# Altium PCB sami_updated_v2.PcbDoc
Units mm, origin at the board's own origin, x right, y up, seen from the top; angles counter-clockwise.
Board outline 29.4 x 15.49 mm, 2 copper layers (Top Layer, Bottom Layer); 20 components, 23 nets, 104 pads, 45 vias.
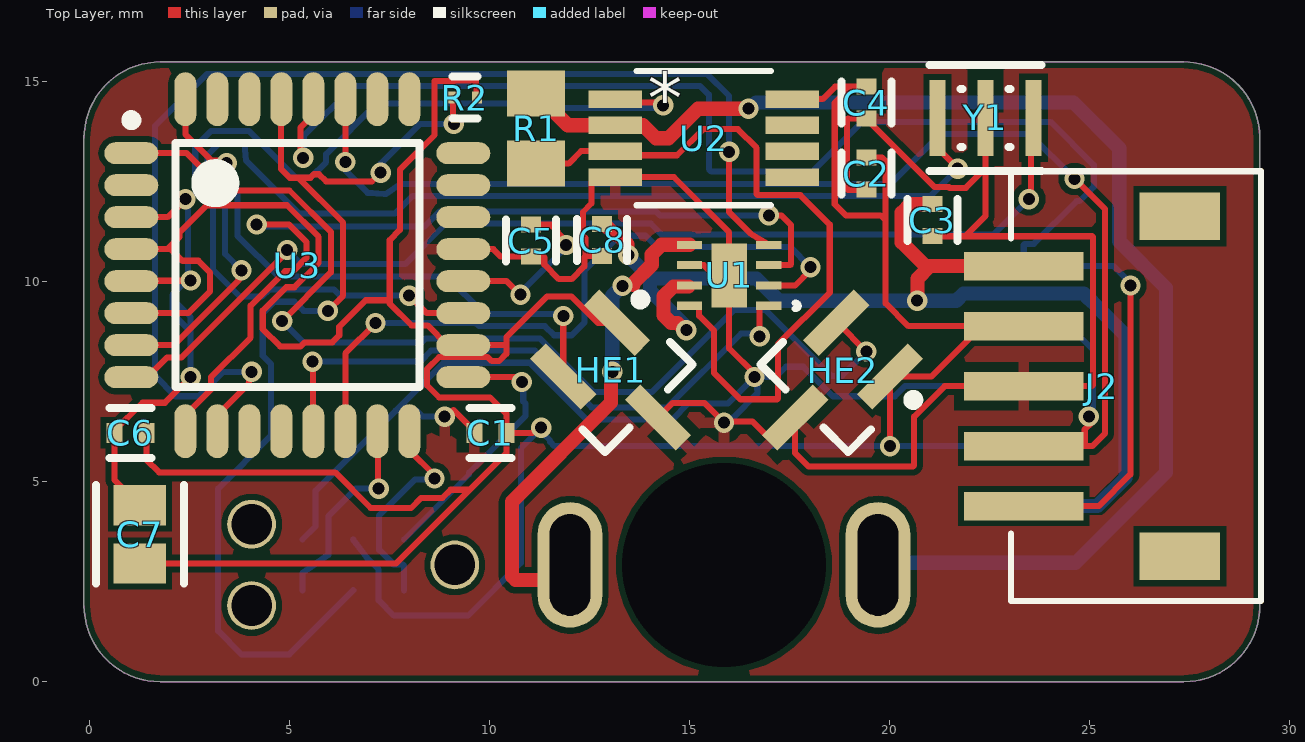
[diagram p0: Top Layer view]
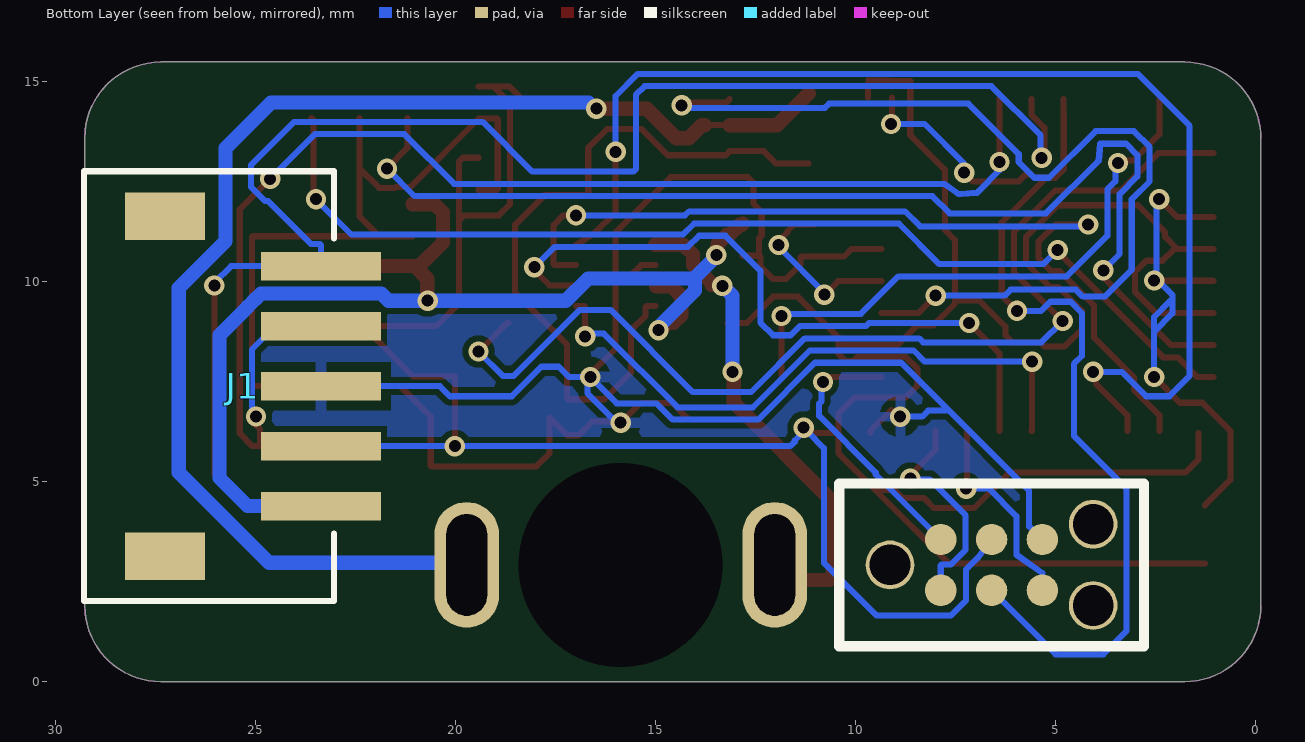
[diagram p1: Bottom Layer view, seen from below]
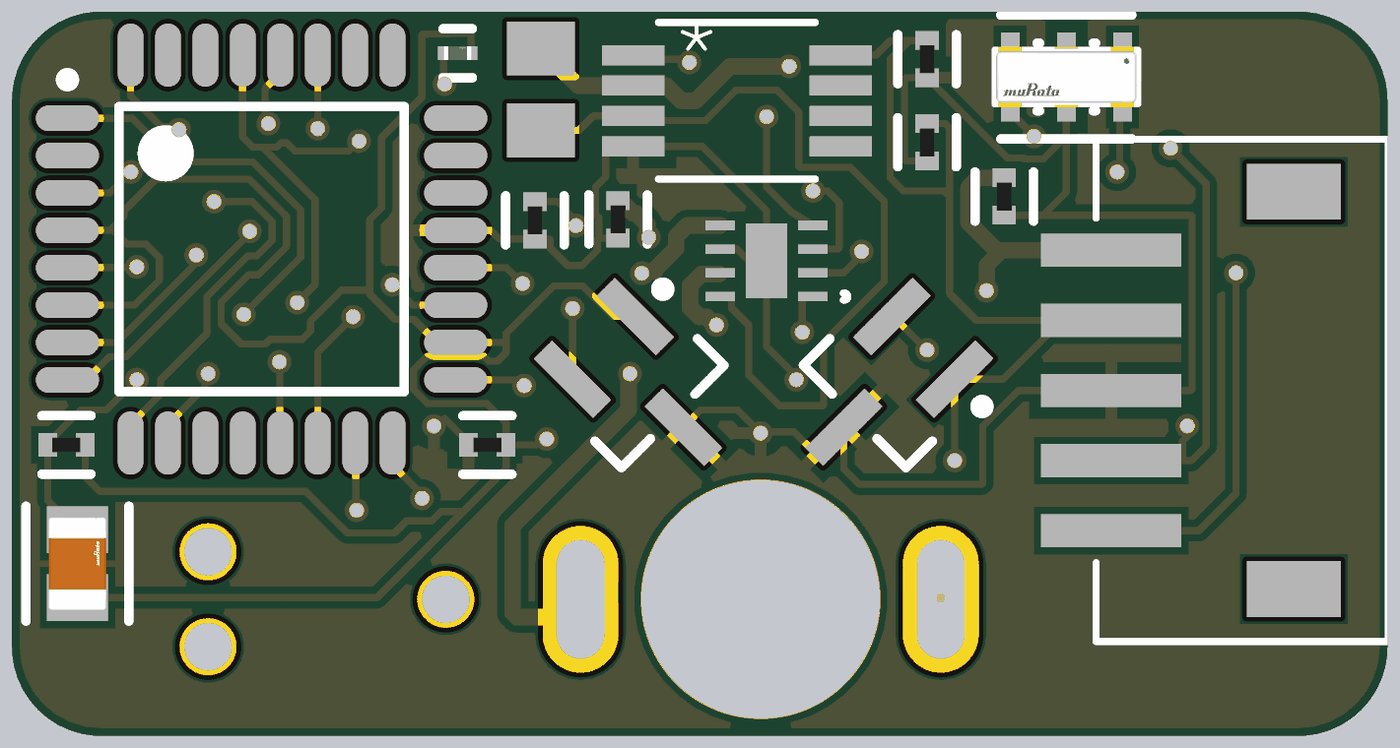
[diagram p2: 3D render of the assembled board from above, using the file's embedded part models]

## Layer stack, top to bottom
Top Solder: solder mask 0.0102, Solder Resist, Dk 3.5
Top Layer: signal copper 0.0356
Dielectric 1: dielectric 0.32, FR-4, Dk 4.8
Bottom Layer: signal copper 0.0356
Bottom Solder: solder mask 0.0102, Solder Resist, Dk 3.5

## Board outline
-0.127,1.905 ccw(c1.778,1.905) 1.778,0 27.368,0 ccw(c27.368,1.905) 29.273,1.905 29.273,13.589 ccw(c27.368,13.589) 27.368,15.494 1.778,15.494 ccw(c1.778,13.589) -0.127,13.589

## Design rules (kind name [scope] priority, off if disabled: settings)
Clearance Clearance_1 [All] p1: gap=0.152 ignorepadtopadclearanceinfootprint=FALSE except(0: Arc-Hole Track-Hole SMDPad-Hole THPad-Hole Via-Hole Fill-Hole Poly-Hole Region-Hole Text-Hole)
HoleSize [All] p1: absolutevalues=TRUE maxlimit=2.54 minlimit=0.3 maxpercent=80.000 minpercent=20.000
MinimumAnnularRing [All] p1: minimumring=0.2
PolygonConnect [All] p1: connectstyle=Relief reliefconductorwidth=0.254 reliefentries=4 polygonreliefangle="90 Angle" airgapwidth=0.254
RoutingVias [All] p1: holewidth=0.3 width=0.508 viastyle="Through Hole" minholewidth=0.3 minwidth=0.508 maxholewidth=0.3 maxwidth=0.508
SolderMaskExpansion [All] p1: expansion=0.102 istentingtop=FALSE
Width [All] p1: maxlimit=0.381 minlimit=0.152 preferedwidth=0.152 minimp=50.000000 maximp=50.000000 favimp=50.000000
29 further rules are at their usual default settings.

## Components (designator, comment, footprint, x,y, rotation, side; value= is the part's Value field where it differs from the comment)
* "Poluou motor" PCBComponent_1 12.025,2.921 r0 top
C1 "GRM155R71C104KA88D - 0.1 uF" FP-GRM15-MFG 10.033,6.223 r0 top value=0.10μF
C2 "GRM155R71C104KA88D - 0.1 uF" FP-GRM15-MFG 19.431,12.7 r90 top value=0.10μF
C3 "GRM155R71C104KA88D - 0.1 uF" FP-GRM15-MFG 21.082,11.538 r90 top value=0.10μF
C4 "GRM155R71C104KA88D - 0.1 uF" FP-GRM15-MFG 19.431,14.478 r90 top value=0.10μF
C5 "GRM155R71C104KA88D - 0.1 uF" FP-GRM15-MFG 11.049,11.03 r90 top value=0.10μF
C6 "GRM155R71C104KA88D - 0.1 uF" FP-GRM15-MFG 1.035,6.223 r0 top value=0.10μF
C7 "GRM21BR61E106KA73L - 10 uF" FP-GRM21B-0_15-IPC_C 1.27,3.683 r90 top
C8 "GRM155R71C104KA88D - 0.1 uF" FP-GRM15-MFG 12.827,11.049 r90 top value=0.10μF
ContactPad "6 Pin Contact Pad" 6PinContactPad 1.27,2.413 r90 bottom
HE1 "TLE4946-2K" INF-PG-SC59_M 13.375,7.453 r315 top
HE2 "TLE4946-2K" INF-PG-SC59_M 18.502,7.453 r225 top
J1 "S5B-ZR-SM4A-TF (LF) (SN)" CONN_S5B-ZR-SM4A-TF_JST 23.368,4.39 r90 bottom
J2 "S5B-ZR-SM4A-TF (LF) (SN)" CONN_S5B-ZR-SM4A-TF_JST 23.368,10.39 r270 top
R1 "RL1220S-R27-F - 0.27 Ohm - 1/3W" RESC2013X50X40NL20T20 11.176,13.829 r90 top
R2 "ERJ-1GNF1002C - 10kOhm" FP-ERJ1G-MFG 9.398,14.605 r0 top value=10kΩ
U1 "A3910EEETR-T" DFN-8_ALM 16.002,10.16 r180 top
U2 "INA2180A1IDGKR" DGK8_TEX 15.367,13.589 r0 top
U3 "ATmega328-AU" 32A_L 5.207,10.414 r0 top
Y1 "CSTNE16M0V53C000R0 - 16 MHz Crystal" FP-CSTNE16M0V53C000R0-MFG 22.409,14.097 r0 top

## Footprints (in the part's own frame and the unit in brackets; to place one, negate y for a bottom-side part, rotate by r counter-clockwise, add the part's x,y. Pads: shape width x height; smd on the part's side, far side on the other; paste and mask are expansions set on the pad)
6PinContactPad [mil]
  round 30.98 smd: 1(-5,260) 2(45,260) 3(-5,210) 4(45,210) 5(-5,160) 6(45,160)
  round 48 hole 40 unplated: 25(20,310) 26(-20,110) 27(60,110)
  silkscreen extent -60,60 100,360
32A_L [mm] "Thin QFP, 32-Leads, Body 7x7mm, Pitch 0.8mm, IPC High Density"
  oval 1.35x0.55 smd: 1(-4.15,2.8) 2(-4.15,2) 3(-4.15,1.2) 4(-4.15,0.4) 5(-4.15,-0.4) 6(-4.15,-1.2) 7(-4.15,-2) 8(-4.15,-2.8) 17(4.15,-2.8) 18(4.15,-2) 19(4.15,-1.2) 20(4.15,-0.4) 21(4.15,0.4) 22(4.15,1.2) 23(4.15,2) 24(4.15,2.8)
  oval 0.55x1.35 smd: 9(-2.8,-4.15) 10(-2,-4.15) 11(-1.2,-4.15) 12(-0.4,-4.15) 13(0.4,-4.15) 14(1.2,-4.15) 15(2,-4.15) 16(2.8,-4.15) 25(2.8,4.15) 26(2,4.15) 27(1.2,4.15) 28(0.4,4.15) 29(-0.4,4.15) 30(-1.2,4.15) 31(-2,4.15) 32(-2.8,4.15)
  silkscreen extent -4.27,-3.05 3.05,3.75, body extent -3.5,-3.5 3.5,3.5, height 1.2
CONN_S5B-ZR-SM4A-TF_JST [mil]
  rect 28x118 smd paste+0 mask+0: 1(0,0) 2(59.06,0) 3(118.11,0) 4(177.17,0) 5(236.22,0)
  rect 47x79 smd: 6(-49.21,153.62) 7(285.43,153.62)
  silkscreen extent -93,-13 330,233, body extent 0,0 10,10, height 10
DFN-8_ALM [mil]
  rect 25x8 smd paste+0 mask+0: 1(-39,30) 2(-39,10) 3(-39,-10) 4(-39,-30) 5(39,-30) 6(39,-10) 7(39,10) 8(39,30)
  rect 35x63 smd paste+0 mask+0: 9(0,0)
  silkscreen extent -68,27 -65,33, body extent 0,0 10,10, height 10
DGK8_TEX [mil]
  rect 52.5x17 smd paste+0 mask+0: 1(-87.25,38.39) 2(-87.25,12.8) 3(-87.25,-12.8) 4(-87.25,-38.39) 5(87.25,-38.39) 6(87.25,-12.8) 7(87.25,12.8) 8(87.25,38.39)
  silkscreen extent -66,-66 66,66, body extent 0,0 10,10, height 10
FP-CSTNE16M0V53C000R0-MFG [mm]
  rect 0.4x1.9 smd paste+0 mask+0: 1(-1.2,0) 2(0,0) 3(1.2,0)
  silkscreen extent -1.4,-1.33 1.4,1.33, body extent -1.6,-0.65 1.6,0.65, height 1
FP-ERJ1G-MFG [mm]
  rect 0.25x0.3 smd paste+0 mask+0: 1(-0.3,0) 2(0.3,0)
  silkscreen extent -0.32,-0.53 0.32,0.53, body extent -0.53,-0.27 0.53,0.27, height 0.25
FP-GRM15-MFG [mm]
  rect 0.4x0.5 smd paste+0 mask+0: 1(-0.4,0) 2(0.4,0)
  silkscreen extent -0.53,-0.62 0.53,0.62, body extent -0.7,-0.38 0.7,0.38, height 0.25
FP-GRM21B-0_15-IPC_C [mm]
  rect 1.006x1.308 smd paste+0 mask+0: 1(-0.726,0) 2(0.726,0)
  silkscreen extent -1.23,-1.1 1.23,1.1, body extent -1,-0.63 1,0.63, height 1.4
INF-PG-SC59_M [mm] "SOT23, 3-Leads, Body 3x1.53mm, Pitch 0.95mm, IPC Low Density"
  rect 1.8x0.55 smd: 1(-1.2,0.95) 2(-1.2,-0.95) 3(1.2,0)
  silkscreen extent -1.32,-1.55 0.88,1.9, body extent -0.88,-1.55 0.88,1.55, height 1.35
PCBComponent_1 [mm]
  round 0 hole 5.1: 28(3.85,0)
  rrect100% 1.62x3.14 hole 1.02 slot 2.54 at 90 deg: m+(7.7,0) m-(0,0)
RESC2013X50X40NL20T20 [mm] "Chip Resistor, 2-Leads, Body 2.00x1.25mm, IPC Medium Density"
  rect 1.15x1.45 smd: 1(-0.875,0) 2(0.875,0)
  body extent -1.1,-0.72 1.1,0.72, height 0.5

## Part data
C1 C2 C3 C4 C5 C6 C8: library part CMP-2100-03641-2, "CAP CER 0.1UF 16V X7R 0402", Capacitance=0.10μF, Manufacturer=Murata, Manufacturer Part Number=GRM155R71C104KA88D, Package=GRM15, Temperature="-55°C to +125°C", Temperature Characteristic=X7R, Temperature Range High=+125°C, Temperature Range Low=-55°C, Tolerance=10%, Voltage Rating=16Vdc, Category=Cap, ComponentLink2Description=Datasheet, ComponentLink2URL=https://search.murata.co.jp/Ceramy/image/img/A01X/G101/ENG/GRM155R71H471KA01-01A.pdf, Device Class L1="Passive Components", Device Class L2=Capacitors, Device Class L3="Ceramic Capacitors", Digikey Description="CAP CER 0.1UF 16V X7R 0402", Height=0.55mm, Ipc Land Pattern Name=CAPC10050X219, Lead Free=yes, Material=Ceramic, Mouser Description="0402 0.1 uF 16V ±10 % Tolerance X7R SMT Multilayer Ceramic Capacitor", Octopart=https://octopart.com/grm155r71c104ka88d-murata-196880, RoHS=TRUE, Standoff Height=0mm
C7: library part CMP-2007-03541-2, "Chip Multilayer Ceramic Capacitors for General Purpose, 0805, 10uF, X5R, 15%, 10%, 25V", Capacitance=10uF, Case Code (Imperial)=0805, Case Code (Metric)=2012, Dielectric=X5R, Max Operating Temperature=85°C, Min Operating Temperature=-55°C, Package Quantity=1, Tolerance=10%, Voltage=25V, Case/Package=0805, Depth=1.25mm, Height=1.25mm, Lead Free="Lead Free", Length=2mm, Material=Ceramic, Mount="Surface Mount", Packaging="Tape and Reel", Radiation Hardening=No, Termination=SMD/SMT, Thickness=0.053inch, Voltage Rating=25V, Voltage Rating (DC)=25V, Width=0.049inch
HE1 HE2: library part CMP-1148-00006-1, "High Precision Hall Effect Latch, PG-SC59, Reel, Green", Manufacturer=Infineon, Bhyst (25degreesC) max="4Â mT", Bop (25degreesC) min="2Â mT", Brp (25degreesC) typ="-2Â mT", Chopped Hall Technology=TRUE, ComponentLink1Description="Manufacturer URL", ComponentLink1URL=http://www.infineon.com/, ComponentLink2Description=Datasheet, ComponentLink2URL=http://www.infineon.com/dgdl/TLE4946-2K_DS_Rev1.pdf?folderId=db3a30431f848401011facc1c83b4674&fileId=db3a30431f848401011fbc925c48637f, ComponentLink3Description="Package Specification", ComponentLink3URL=http://www.infineon.com/dgdl/SC59-Package_Overview.pdf?folderId=db3a30431936bc4b01194dc0d34440b0&fileId=db3a30431936bc4b01194dd1aa1d40cf, DatasheetVersion="Rev. 1.0", Direction Detection=FALSE, Green=TRUE, Interface="open collector", Mounting Technology="Surface Mount", PackageDescription="3-Pin Semiconductor Package, 3 x 1.53 mm Body, 0.95 mm Pitch", PackageReference=PG-SC59, PackageVersion=Mar-08, Packing=Reel, PartNumber=TLE4946-2K, Target Application=Automotive, Type=Latch
J1 J2: "No Description Available", Mfr_Name=JST, Copyright="Copyright (C) 2021 Ultra Librarian. All rights reserved.", Manufacturer_Part_Number="S5B-ZR-SM4A-TF (LF) (SN)", RefDes=RefDes, Type=DEV
R1: library part CMP-2001-03162-1, Manufacturer=Susumu, Part Number=RL1220S-R27-F
R2: library part CMP-2004-03445-2, "RES SMD 10K OHM 1% 1/20W 0201", Manufacturer="Panasonic Electronic Components", Manufacturer Part Number=ERJ-1GNF1002C, Package=ERJ1G, Power Rating=0.05W, Resistance=10kΩ, Temperature="-55°C to +125°C", Temperature Coefficient=200ppm/°C, Temperature Range High=+125°C, Temperature Range Low=-55°C, Tolerance=1%, Voltage Rating=25V, Automotive=Yes, Automotive Grade="Grade 1", Category=Res, ComponentLink2Description=Datasheet, ComponentLink2URL=https://industrial.panasonic.com/cdbs/www-data/pdf/RDA0000/AOA0000C304.pdf, Composition="Thick Film", Device Class L1="Passive Components", Device Class L2=Resistors, Device Class L3="Chip SMD Resistors", Digikey Description="RES SMD 10K OHM 1% 1/20W 0201", Footprint Url=https://industrial.panasonic.com/cdbs/www-data/pdf/RDA0000/DMA0000COL17.pdf, Height=0.26mm, Lead Free=Yes, Mouser Description="Thick Film Resistors - SMD 0201 10Kohm 1% HalogenFree AEC-Q200", Octopart=https://octopart.com/erj-1gnf1002c-panasonic-55419697, RoHS=TRUE, Series=ERJ
U1: "No Description Available", Mfr_Name="Allegro Microsystems Inc.", Copyright="Copyright (C) 2021 Ultra Librarian. All rights reserved.", Manufacturer_Part_Number=A3910EEETR-T, RefDes=RefDes, Type=DEV
U2: "No Description Available", Mfr_Name="Texas Instruments", Copyright="Copyright (C) 2021 Ultra Librarian. All rights reserved.", Manufacturer_Part_Number=INA2180A1IDGKR, RefDes=RefDes, Type=DEV
U3: library part CMP-0095-00261-2, "8-bit AVR Microcontroller, 32KB Flash, 1KB EEPROM, 2KB SRAM, 32-pin TQFP, Industrial Grade (-40°C to 85°C)", Code_JEDEC=MS-026-ABA, ComponentLink1Description="Manufacturer URL", ComponentLink1URL=http://www.atmel.com/, ComponentLink2Description="ATmega48A/48PA/88A/88PA/168A/168PA/328/328P Datasheet", ComponentLink2URL=http://www.atmel.com/dyn/resources/prod_documents/doc8271.pdf, ComponentLink3Description="ATmega48A/48PA/88A/88PA/168A/168PA/328/328P Summary", ComponentLink3URL=http://www.atmel.com/dyn/resources/prod_documents/8271S.pdf, DatasheetVersion="revD, May-2011", PackageDescription="32-Lead, 7x7x1.0 mm Body, 0.8mm Lead Pitch, Thin Profile Plastic Quad Flat Package (TQFP)", PackageReference=32A, PackageVersion="revC, Oct-2010", RevisionNote="DatasheetVersion & PackageVersion updated. URLs added."
Y1: library part CMP-06057-000009-1, "CERAMIC RES 16.0000MHZ 15PF SMD", Capacitance=15pF, Case/Package=SMD/SMT, Frequency=16MHz, Frequency Stability=0.15%, Frequency Tolerance=0.5%, Max Operating Temperature=125°C, Min Operating Temperature=-40°C, Resistor Type=Ceramic, Impedance=40R, Mount="Surface Mount", Packaging="Tape and Reel"

## Via types
v1: diameter 0.508, hole 0.3, Top Layer to Bottom Layer, tented both sides, 45 vias

## Nets (pads, with @x,y where several pads share a name; then routed paths per layer and width w, separated by ;. In a path a pad name is that pad's centre, name@x,y a point inside that pad or via, vN(x,y) a via of type N, cw(c..) or ccw(c..) an arc to the next point about the centre after c; other vN are vias at no path point)
CUR1_TO_OPAMP_IN+: R1.1 U1.8 U2.3 | length 18.3
  Top Layer w0.152: R1.1 11.989,12.954 12.299,13.264 U2.3 13.252,13.162 14.699,13.162 15.354,13.818 16.218,13.818 16.688,13.348 16.688,12.192 16.713,12.167 17.78,12.167 18.517,11.43 18.517,9.728 17.221,8.433 17.221,7.087 17.196,7.061 16.281,7.061 15.621,7.722 15.621,8.782 15.253,9.15 15.253,9.373 15.227,9.398 U1.8
CURRENT_IN: U2.1 U3.19 | length 24.7
  Top Layer w0.152: v1(8.001,9.652) 8.439,9.214 U3.19 ; U2.1 13.237,14.478 14.283,14.478 v1(14.351,14.41)
  Bottom Layer w0.152: v1(8.001,9.652) 6.279,9.652 6.126,9.804 4.5,9.804 4.322,9.627 3.774,9.627 3.099,10.302 3.099,12.062 2.654,12.506 2.654,13.373 3.048,13.767 4,13.767 5.168,12.598 5.534,12.598 5.924,12.989 5.924,13.192 7.185,14.453 10.667,14.453 10.773,14.346 14.288,14.346 v1(14.351,14.41)
GND: C1.1 C2.1 C3.1 C4.1 C5.1 C8.1 ContactPad.6 HE1.3 HE2.3 J1.3 J2.3 U1.6 U1.9 U2.4 U3.21 Y1.2 | length 72.9
  Top Layer w0.152: v1(8.89,6.628) 8.954,6.628 9.116,6.79 9.633,6.273 C1.1 ; U3.21 10.109,10.814 10.293,10.63 C5.1 11.354,10.63 11.379,10.605 11.379,10.433 11.747,10.065 12.065,10.065 12.383,10.383 12.383,10.617 12.415,10.649 ; C8.1 12.415,10.649 ; HE1.3 14.592,6.972 15.38,6.972 v1(15.875,6.477) 15.902,6.504 16.588,6.504 16.93,6.162 17.211,6.162 HE2.3 17.653,5.715 17.983,5.385 20.599,5.385 20.625,5.41 20.625,6.628 21.387,7.39 J2.3 25.07,7.39 25.095,7.415 25.095,11.113 25.07,11.138 21.907,11.138 ; U1.6 15.367,10.414 15.621,10.16 U1.9 ; v1(16.637,7.62) 16.637,7.696 16.002,8.331 U1.9 ; C2.1 18.974,12.3 18.948,12.325 18.948,14.053 18.974,14.078 C4.1 21.142,12.367 21.495,12.367 21.517,12.344 21.917,12.344 22.409,12.836 22.409,12.929 ; C3.1 21.907,11.138 ; Y1.2 22.409,12.929 ; 12.415,10.649 12.415,11.088 12.348,11.154 12.348,11.744 12.56,11.956 12.56,12.474 12.7,12.614 14.624,12.614 16.002,11.236 U1.9 ; 21.907,11.138 22.409,11.639 22.409,12.929
  Bottom Layer w0.152: ContactPad.6 5.665,3.887 5.665,4.776 7.668,6.779 ; v1(8.89,6.628) 8.342,6.628 8.191,6.779 7.668,6.779 ; v1(15.875,6.477) 15.971,6.477 16.108,6.614 16.115,6.614 16.708,7.207 16.708,7.3 16.705,7.303 16.705,7.552 v1(16.637,7.62) ; J1.3 20.397,7.39 20.145,7.137 18.596,7.137 17.86,7.874 17.423,7.874 17.169,7.62 v1(16.637,7.62) ; 7.668,6.779 8.865,7.976 11.019,7.976 12.442,6.553 14.579,6.553 14.985,6.96 15.977,6.96 v1(16.637,7.62)
INPUT1: U1.1 U3.13 | length 15.4
  Top Layer w0.152: v1(5.588,8.001) 5.597,7.992 5.597,6.273 U3.13 ; v1(16.764,8.636) 16.764,9.373 16.789,9.398 U1.1
  Bottom Layer w0.152: v1(5.588,8.001) 8.275,8.001 8.555,8.28 11.146,8.28 12.568,6.858 14.453,6.858 16.299,8.704 16.696,8.704 v1(16.764,8.636)
INPUT2: U1.2 U3.14 | length 17.4
  Top Layer w0.152: U3.14 6.407,8.21 v1(7.163,8.966) ; U1.2 17.653,9.906 18.034,10.287 v1(18.034,10.363)
  Bottom Layer w0.152: v1(7.163,8.966) 9.672,8.966 9.749,8.89 11.398,8.89 11.627,8.661 12.065,8.661 12.383,8.979 12.383,10.274 13.259,11.151 13.916,11.151 14.195,10.871 17.526,10.871 v1(18.034,10.363)
INPUT3: U1.3 U3.9 | length 22.8
  Top Layer w0.152: U3.9 2.407,6.664 3.046,7.303 3.046,7.612 4.039,8.605 4.039,9.402 4.903,10.267 5.107,10.267 5.436,10.595 5.436,10.995 5,11.43 v1(4.191,11.43) ; U1.3 17.526,10.414 17.551,10.439 17.551,11.417 17.31,11.659 v1(16.993,11.659)
  Bottom Layer w0.152: v1(4.191,11.43) 4.239,11.382 8.39,11.382 8.768,11.76 14.168,11.76 14.27,11.659 v1(16.993,11.659)
INPUT4: U1.4 U3.10 | length 30.3
  Top Layer w0.152: U3.10 3.207,6.664 3.996,7.453 3.996,7.679 v1(4.064,7.747) ; v1(16.002,13.249) 16.002,11.74 16.535,11.207 U1.4
  Bottom Layer w0.152: v1(4.064,7.747) 3.349,7.747 2.74,7.137 2.159,7.137 1.651,7.645 1.651,13.898 2.95,15.197 15.448,15.197 16.002,14.643 v1(16.002,13.249)
M+: *.m+ R1.2 U2.2 | length 32.7
  Top Layer w0.152: U2.2 U2.2@13.772,13.914 ; 14.351,13.589 14.356,13.594
  Top Layer w0.356: R1.2 11.966,13.914 U2.2 ; U2.2@13.772,13.914 13.85,13.914 14.175,13.589 14.351,13.589 14.487,13.589 15.224,14.326 v1(16.485,14.326)
  Bottom Layer w0.152: *.m+ *.m+@19.725,2.972
  Bottom Layer w0.356: v1(16.485,14.326) 16.526,14.326 16.678,14.478 24.613,14.478 25.756,13.335 25.756,11.012 26.924,9.843 26.924,5.232 24.663,2.972 *.m+@19.725,2.972
M-: *.m- U1.5 | length 13.3
  Top Layer w0.152: 10.572,2.629 10.662,2.54 ; *.m-@11.347,3.87 12.025,3.192 *.m- *.m-@11.644,2.54
  Top Layer w0.356: 10.572,2.629 10.572,4.5 13.052,6.979 13.052,7.718 v1(13.081,7.747) v1@13.099,7.765 ; 10.662,2.54 *.m-@11.644,2.54 ; 13.609,9.926 13.609,9.968 14.068,10.426 14.068,10.678 14.312,10.922 U1.5
  Bottom Layer w0.356: v1(13.081,7.747) 13.081,9.652 v1@13.335,9.906
  other v1: 13.335,9.897
MISO: ContactPad.1 U3.16 | length 5.5
  Top Layer w0.152: U3.16 8.007,5.787 8.636,5.157 v1(8.636,5.08)
  Bottom Layer w0.152: ContactPad.1 7.874,2.908 7.849,2.934 7.616,2.934 7.252,3.298 7.252,4.156 8.153,5.058 8.614,5.058 v1(8.636,5.08)
MOSI: ContactPad.5 U3.15 | length 5.2
  Top Layer w0.152: U3.15 7.223,6.248 7.223,4.842 v1(7.239,4.826)
  Bottom Layer w0.152: ContactPad.5 5.334,2.718 5.982,3.175 5.982,4.14 6.668,4.826 v1(7.239,4.826)
NetC5_2: C5.2 U3.20 | length 4.4
  Top Layer w0.152: U3.20 10.44,10.014 10.776,9.677 v1(10.786,9.677) ; C5.2 11.544,11.43 11.706,11.269 11.706,11.236 11.928,11.013 v1(11.928,10.917)
  Bottom Layer w0.152: v1(10.786,9.677) 10.786,9.726 11.928,10.868 v1(11.928,10.917)
NetC6_1: C6.1 C7.2 U3.3 U3.5 | length 13.5
  Top Layer w0.152: U3.5 1.066,10.024 2.531,10.024 v1(2.54,10.033) ; U3.3 1.962,11.614 v1(2.413,12.065) ; C7.2 0.635,5.044 0.635,6.273 1.336,6.974 1.894,6.974 v1(2.54,7.62)
  Bottom Layer w0.152: 2.134,9.525 2.54,9.119 2.54,8.75 ; v1(2.413,12.065) 2.476,12.002 2.476,10.096 v1(2.54,10.033) 2.445,10.033 2.083,9.671 2.083,9.525 2.083,9.207 2.54,8.75 ; v1(2.54,7.62) 2.54,8.75
NetU3_7: U3.7 Y1.1 | length 28.6
  Top Layer w0.152: U3.7 2.114,8.414 3.742,10.042 3.742,10.219 v1(3.81,10.287) ; Y1.1 21.209,13.347 21.717,12.839 v1(21.717,12.827)
  Bottom Layer w0.152: v1(3.81,10.287) 3.404,10.693 3.404,12.188 2.959,12.632 2.959,13.167 3.242,13.449 3.886,13.449 3.924,13.03 5.245,11.709 7.654,11.709 8.085,12.141 21.031,12.141 v1(21.717,12.827)
NetU3_8: U3.8 Y1.3 | length 26.9
  Top Layer w0.152: U3.8 1.457,7.614 1.952,8.109 2.315,8.109 4.953,10.748 v1(4.953,10.795) ; v1(23.495,12.065) 23.552,12.122 23.552,14.04 Y1.3
  Bottom Layer w0.152: v1(4.953,10.795) 5.309,10.439 7.908,10.439 8.924,11.455 14.042,11.455 14.322,11.176 22.606,11.176 v1(23.495,12.065)
Q1: HE1.2 U3.32 | length 14.6
  Top Layer w0.152: U3.32 2.407,13.684 3.056,13.035 3.374,13.035 v1(3.442,12.967) ; HE1.2 v1(11.855,9.144)
  Bottom Layer w0.152: v1(3.442,12.967) 3.51,12.899 3.51,12.513 3.708,12.314 3.708,11.151 4.724,10.135 8.935,10.135 9.875,9.195 11.804,9.195 v1(11.855,9.144)
Q2: HE2.2 U3.1 | length 26.8
  Top Layer w0.152: U3.1 2.438,13.214 3.371,12.281 5.012,12.281 6.045,11.247 6.045,10.236 v1(4.826,9.017) ; HE2.2 18.713,8.973 v1(19.431,8.255)
  Bottom Layer w0.152: v1(4.826,9.017) 5.359,8.484 8.313,8.484 8.415,8.585 11.272,8.585 12.618,7.239 14.072,7.239 16.129,9.296 16.901,9.296 18.552,7.646 18.822,7.646 v1(19.431,8.255)
RESET: ContactPad.3 R2.1 U3.29 | length 26.3
  Top Layer w0.152: U3.29 4.807,14.376 4.807,14.173 4.801,14.173 4.801,13.03 4.801,12.815 5.017,12.598 5.232,12.598 ; v1(5.969,9.271) 6.35,9.652 6.35,11.481 5.232,12.598 ; v1(7.29,12.725) 7.074,12.509 5.924,12.509 5.748,12.686 5.622,12.686 5.534,12.598 5.232,12.598 ; R2.1 9.098,13.97 9.119,13.949 v1(9.119,13.945)
  Bottom Layer w0.152: v1(5.969,9.271) 5.364,9.271 5.135,9.5 4.626,9.5 4.343,9.217 4.343,8.15 4.547,7.947 4.547,6.147 3.226,4.826 3.226,1.27 3.81,0.686 5.004,0.686 ContactPad.3 ; v1(7.29,12.725) 7.29,12.954 8.28,13.945 v1(9.119,13.945)
SCK: ContactPad.2 U3.17 | length 6.7
  Top Layer w0.152: U3.17 10.698,7.614 v1(10.819,7.493)
  Bottom Layer w0.152: ContactPad.2 9.498,5.18 9.498,5.228 10.916,6.645 10.916,6.949 10.854,7.01 10.854,7.458 v1(10.819,7.493)
SCL: J1.5 J2.5 U3.28 | length 39.4
  Top Layer w0.152: v1(5.351,13.098) 5.283,13.166 5.283,13.849 5.607,14.173 U3.28 ; J2.5 25.243,4.39 26.035,5.182 v1(26.035,9.906)
  Bottom Layer w0.152: v1(5.351,13.098) 5.376,13.123 5.376,13.657 6.612,14.892 15.278,14.892 15.494,14.677 15.494,12.814 15.557,12.751 18.085,12.751 19.329,13.995 24.037,13.995 25.121,12.912 25.121,12.373 24.762,12.014 24.689,12.014 23.622,10.947 23.393,10.947 23.368,10.922 J1.5 25.615,10.39 26.035,9.97 v1(26.035,9.906)
SDA: J1.4 J2.4 U3.27 | length 34.7
  Top Layer w0.152: v1(6.407,12.992) U3.27 ; J2.4 24.892,5.89 ; v1(24.638,12.573) 25.4,11.811 25.4,6.208 25.082,5.89 24.892,5.89 ; v1(24.994,6.632) 25.052,6.573 25.052,6.467 24.892,6.307 24.892,5.89
  Bottom Layer w0.152: v1(6.407,12.992) 6.407,12.783 6.925,12.265 6.964,12.225 7.369,12.192 7.424,12.192 7.464,12.22 7.781,12.446 20.041,12.446 21.285,13.691 23.52,13.691 v1(24.638,12.573) ; J1.4 24.511,8.89 25.095,8.306 25.095,6.829 24.994,6.728 v1(24.994,6.632)
VCC: C1.2 C2.2 C4.2 C6.2 C7.1 ContactPad.4 HE1.1 HE2.1 J1.2 J2.2 R2.2 U2.8 U3.4 U3.6 U3.18 | length 98.5
  Top Layer w0.152: U3.6 2.483,9.214 3.023,9.754 3.023,10.233 2.732,10.523 2.332,10.523 2.042,10.814 1.956,10.814 ; U3.4 1.956,10.814 ; C7.1 7.675,2.957 9.519,4.801 ; C6.2 1.435,5.55 1.753,5.232 6.15,5.232 7.039,4.343 8.05,4.343 8.304,4.597 8.836,4.597 9.039,4.801 9.519,4.801 ; R2.2 9.677,15.037 8.636,15.011 8.636,13.665 7.772,12.802 7.772,11.297 7.518,11.043 7.518,9.538 ; v1(11.303,6.35) 11.207,6.35 11.08,6.223 C1.2 ; HE1.1 12.719,8.973 12.065,9.627 11.447,9.627 11.373,9.552 10.433,8.613 10.433,8.414 ; U2.8 18.339,14.564 18.653,14.878 19.05,14.878 ; C2.2 19.824,13.1 19.914,13.011 19.914,11.532 ; C4.2 19.05,14.878 ; v1(20.022,5.89) HE2.1 21.057,7.629 J2.2@22.317,8.89 ; J2.2 J2.2@22.317,8.89 ; 1.956,10.814 2.265,11.124 2.265,11.235 2.943,11.913 4.949,11.913 5.74,11.121 5.74,10.469 5.135,9.863 4.931,9.863 4.343,9.276 4.343,8.817 4.778,8.383 5.287,8.383 5.388,8.484 6.082,8.484 6.255,8.657 6.255,8.875 6.918,9.538 7.518,9.538 ; 7.518,9.538 7.518,9.452 8.061,8.909 8.462,8.909 8.957,8.414 10.433,8.414 ; 9.519,4.801 10.433,5.715 C1.2 ; C1.2 10.433,6.702 10.024,7.11 8.748,7.11 8.453,7.405 8.453,7.823 8.748,8.118 9.966,8.118 10.069,8.014 10.249,8.014 10.433,8.198 10.433,8.414 ; 19.05,14.878 18.644,14.472 18.644,11.938 18.923,11.659 19.787,11.659 19.914,11.532 ; 19.914,11.532 19.914,9.461 20.485,8.89 J2.2@22.317,8.89
  Bottom Layer w0.152: ContactPad.4 6.947,3.099 7.239,2.807 7.239,2.032 7.62,1.651 9.474,1.651 10.795,2.972 10.795,5.842 11.187,6.234 11.267,6.234 v1@11.303,6.198 ; v1(11.303,6.35) v1@11.303,6.198 ; J1.2 v1(20.022,5.89) 11.633,5.89 11.526,5.998 11.526,6.031 11.359,6.198 v1@11.303,6.198
VM: C3.2 C8.2 J1.1 J2.1 U1.7 | length 30.5
  Top Layer w0.152: U1.7@14.986,9.881 U1.7
  Top Layer w0.356: C8.2 12.849,11.427 12.899,11.427 13.147,11.179 13.214,11.179 13.454,10.939 13.454,10.697 v1(13.483,10.668) ; v1(14.931,8.789) 14.89,8.789 14.713,8.966 14.557,8.966 14.364,9.16 14.364,9.636 14.608,9.881 U1.7@14.986,9.881 ; v1(20.701,9.525) 20.712,9.536 20.712,10.074 21.027,10.39 ; C3.2 20.528,11.938 20.32,11.73 20.32,10.983 20.913,10.39 21.027,10.39 ; J2.1 21.027,10.39
  Bottom Layer w0.152: 24.79,9.704 24.865,9.704
  Bottom Layer w0.356: v1(13.483,10.668) 13.483,10.647 14.021,10.109 14.021,10.084 ; v1(14.931,8.789) 14.931,8.83 14.855,8.907 14.855,8.945 14.021,9.778 14.021,10.084 ; J1.1 25.205,4.39 25.908,5.093 25.908,8.661 25.197,9.373 25.197,9.382 25.003,9.576 24.994,9.576 24.865,9.704 ; 24.79,9.704 21.861,9.704 21.682,9.525 v1(20.701,9.525) 17.248,9.525 16.689,10.084 14.021,10.084
pads on no net: *.28 ContactPad.25 ContactPad.26 ContactPad.27 J1.6 J1.7 J2.6 J2.7 U2.5 U2.6 U2.7 U3.2 U3.11 U3.12 U3.22 U3.23 U3.24 U3.25 U3.26 U3.30 U3.31

## Polygon pours and split planes (outlines as drawn)
GND on Top Layer "GND_L01_P000" (solid, remove dead copper, pour order 0): -3.302,18.415 -3.175,18.288 33.909,18.288 33.909,-1.143 31.242,-3.81 -2.667,-3.81
GND on Bottom Layer "GND_L02_P001" (solid, remove dead copper, pour order 1): -1.905,18.161 33.401,18.161 33.655,17.907 33.02,17.272 33.02,-2.54 -1.905,-2.54 -2.159,-2.794

## Keep-outs
Keep-Out Layer:
  the board outline again, w0.013

## Text inside footprints (layer, text, board x,y; h text height)
U2: Top Overlay "*" at 13.97,13.97 h1.27; Mechanical 13 "*" at 13.881,13.792 h1.27